# Allegro board 8266-OLED-TIMER-MAX-TPS7333-DS3231.brd
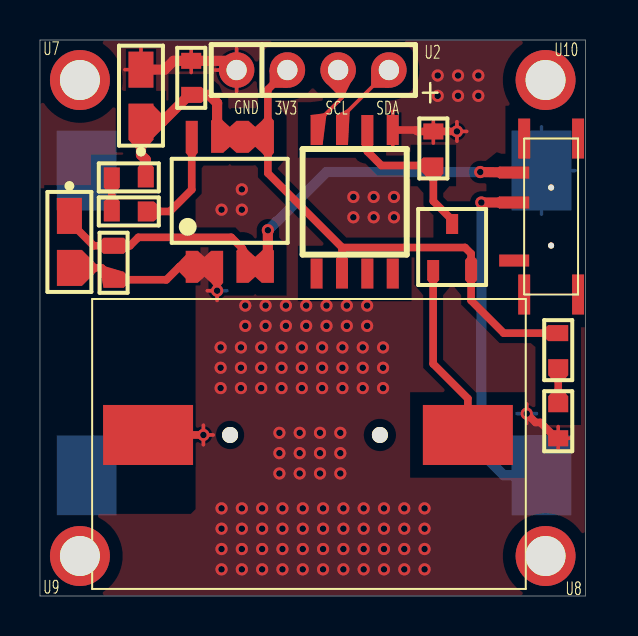
[diagram p0: board, top side]
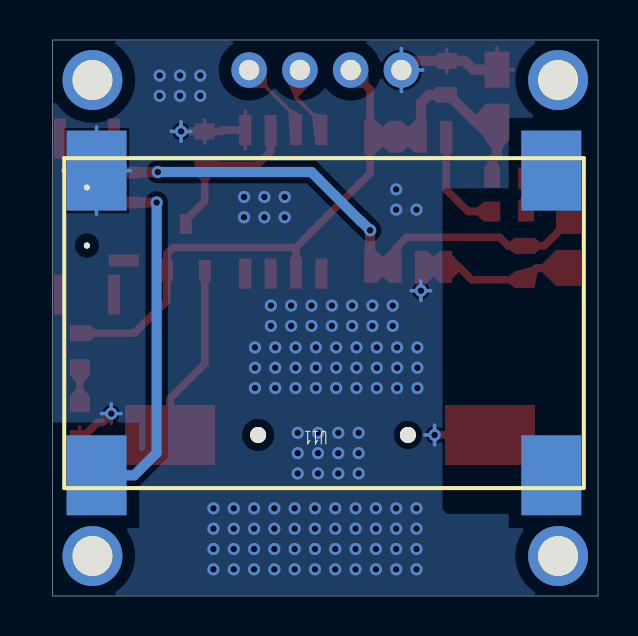
[diagram p1: board, bottom side, seen from below]

Outline 27.3 x 27.8 mm; copper layers: TOP, BOTTOM. Coordinates in mm from the lower left corner of the outline.
Outline path: 0,27.8 0,0 27.3,0 27.3,27.8 0,27.8

## Design rules (mm)
net group DIFFPAIR3: nets SCL SDA

## Placement (name value [footprint] x y rotation side)
BT1  BATTERY  [BT]  13.41 8.05 180 top
C1  10uF  [SMDC3216]  1.47 17.7 270 top
C2  0.1uF  [SMD0603]  3.68 16.66 270 top
C3  10uF  [SMDC3216]  5.05 25.02 90 top
C5  100n  [SMD0603]  7.57 25.91 90 top
C6  100n  [SMD0603]  19.68 22.38 90 top
POWER1  LED  [SMD0603]  25.93 8.74 90 top
R1  250k  [SMD0603]  4.45 19.23 180 top
R2  10k  [SMD0603]  4.45 20.93 180 top
R3  470  [SMD0603]  25.93 12.29 270 top
U1  TPS7333  [SOP8-1P27]  7.59 16.46 90 top
U2  4PIN  [SIP4]  9.84 26.3 0 top
U5  DS3231MZRL  [SOIC-8]  15.75 19.71 90 top
U6  BAT54C  [SOT23-3]  20.62 17.45 90 top
U7  1PIN  [HOLE_2MM]  2 25.8 0 top
U8  1PIN  [HOLE_2MM]  25.3 2 0 top
U9  1PIN  [HOLE_2MM]  2 2 0 top
U10  1PIN  [HOLE_2MM]  25.3 25.8 0 top
U11  4056mokuai  [4056MOKUAI]  0.71 21.89 0 bottom
U12  7PINKEY  [7JIAO-BODONGKAIGUAN]  25.58 18.97 180 top

## Library data of the parts
BT1 = BATTERY
C1 C3 = CAP
C2 C5 C6 = CAP NP
POWER1 = LED
R1-R3 = R
U1 = TPS7333
U2 = 4PIN
U5 = DS3231MZRL
U6 = BAT54C
U7-U10 = 1PIN
U11 = 4056mokuai
U12 = 7PINKEY

## Footprints (pads in the part's own frame, mm; a bottom-side part is the same pattern mirrored in y, then rotated)
7JIAO-BODONGKAIGUAN
  round 0.3 hole 0.8: (0,1.45) (0,-1.45)
  rect 0.599x1.999 smd: 1(1.349,3.899) 2(-1.349,3.899) 3(-1.349,-3.899) 4(1.349,-3.899)
  rect 1.501x0.599 smd: 5(1.849,2.2) 6(1.849,-0.701) 7(1.849,-2.2)
4056MOKUAI
  rect 3x4 smd: 1(1.626,15.86) 2(1.626,0.625) 3(24.384,0.625) 4(24.384,15.86)
BT
  round 0.8 hole 1.199 unplated: (-3.599,0)
  round 0.8 hole 1.001 unplated: (3.899,0)
  rect 4.501x3 smd: 1(-8.001,0) 2(8.001,0)
HOLE_2MM
  round 3 hole 1.999 unplated: (0,0)
SIP4
  round 1.778 hole 1.016: 1(0,0) 2(2.54,0) 3(5.08,0) 4(7.62,0)
SMD0603
  rect 0.8x1.001 smd: 1(-0.851,0) 2(0.851,0)
SMDC3216
  rect 1.801x1.25 smd: 1(-1.3,0) 2(1.3,0)
SOIC-8
  rect 1.501x0.599 smd: 1(-3.589,1.905) 2(-3.589,0.635) 3(-3.589,-0.635) 4(-3.589,-1.905) 5(3.589,-1.905) 6(3.589,-0.635) 7(3.589,0.635) 8(3.589,1.905)
SOP8-1P27
  rect 1.6x0.599 smd: 1(0,0) 2(0,-1.27) 3(0,-2.54) 4(0,-3.81) 5(6.5,-3.81) 6(6.5,-2.54) 7(6.5,-1.27) 8(6.5,0)
SOT23-3
  rect 1.001x0.599 smd: 1(-1.151,0.95) 2(-1.151,-0.95) 3(1.151,0)

## Nets
3V3: C3.1 C5.1 R2.1 R3.1 U1.5(OUT#5) U1.6(OUT#6) U1.7(FB) U2.2 U5.2(VCC) U6.2
0: BT1.2(-) C1.2 C2.2 C3.2 C5.2 C6.2 POWER1.1(CATHODE) U1.1(GND) U1.2(EN) U2.1 U5.5(GND) U11.3(OUT-)
BAT-IN: U11.4(OUT+) U12.6
BAT-OUT: C1.1 C2.1 U1.3(IN#3) U1.4(IN#4) U12.7
SCL: U2.3 U5.8(SCL)
SDA: U2.4 U5.7(SDA)
N70651: R1.1 U1.8(RESET)
N70975: POWER1.2(ANODE) R3.2
N127191: R1.2 R2.2
N128054: C6.1 U5.6(VBAT) U6.3
N128552: BT1.1(+) U6.1

Pads without a net: U5 1 3 4; U11 1 2; U12 1 2 3 4 5

## Via types
v1: diameter 0.61, hole 0.33, TOP to BOTTOM, 119 vias

## Routing (per net, layer and track width the routed paths; a pad name or vN(x,y) marks a point on that pad's centre or on a via; arc(x,y) is an arc through that point)
3V3: length 37.7
  TOP w0.381: 15.12,17.42 21.27,17.42 21.57,17.12 U6.2 21.57,14.78 23.21,13.14 R3.1 ; 15.12,17.42 15.11,17.42 U5.2 ; 15.12,17.42 11.4,21.14 U1.5 ; U1.5 U1.6 U1.7 ; U1.5 11.4,25.32 U2.2
  TOP w0.508: R2.1 5.3,21.82 5.05,22.06 C3.1 6.13,23.72 7.47,25.06 C5.1 8.46,25.06 8.86,24.65 U1.7
0: length 56.2
  TOP w0.178: 4.25,26.32 C3.2 5.05,27.4 ; 19.68,23.81 C6.2 19.68,22.64 ; 24.36,9.61 v1(24.36,9.12) 24.36,8.63 ; U2.1 9.84,27.37 ; U2.1 8.77,26.3 ; U2.1 9.84,25.23 ; v1(20.87,23.23) 20.87,23.72 ; v1(20.87,23.23) 21.35,23.23 ; v1(20.87,23.23) 20.87,22.74 ; POWER1.1 25.93,8.47 ; POWER1.1 26.62,7.89 ; POWER1.1 25.93,7.3 ; 7.57,27.34 C5.2 7.57,26.17 ; 8.38,15.27 v1(8.86,15.27) 8.86,14.78 ; 17.65,22.36 U5.5 17.65,24.23 ; v1(8.18,8.05) 8.18,8.54 ; v1(8.18,8.05) 8.67,8.05 ; v1(8.18,8.05) 8.18,7.56
  TOP w0.381: v1(24.36,9.12) 24.8,8.68 25.04,8.68 25.83,7.89 POWER1.1 ; v1(20.87,23.23) C6.2 18.86,23.23 18.79,23.3 U5.5 ; v1(8.86,15.27) U1.2 U1.1 6.97,16.46 6.33,15.81 C2.2 3.09,16.4 C1.2 ; BT1.2 v1(8.18,8.05)
  TOP w0.508: U2.1 9.38,26.76 C5.2 6.68,26.76 6.24,26.32 C3.2
  BOTTOM w0.178: v1(20.87,23.23) 21.35,23.23 ; v1(20.87,23.23) 20.87,23.72 ; v1(20.87,23.23) 20.38,23.23 ; v1(20.87,23.23) 20.87,22.74 ; v1(8.86,15.27) 9.35,15.27 ; v1(8.86,15.27) 8.86,14.78 ; v1(8.86,15.27) 8.38,15.27 ; v1(8.86,15.27) 8.86,15.75 ; 25.1,19.09 U11.3 ; U11.3 25.1,23.45 ; U11.3 23.41,21.27 ; U11.3 26.78,21.27 ; v1(24.36,9.12) 24.85,9.12 ; v1(24.36,9.12) 24.36,9.61 ; v1(24.36,9.12) 23.87,9.12 ; 9.84,25.23 U2.1 ; U2.1 9.84,27.37 ; U2.1 8.77,26.3 ; v1(8.18,8.05) 8.67,8.05 ; v1(8.18,8.05) 8.18,7.56 ; v1(8.18,8.05) 8.18,8.54
  vias: v1(9.04,12.43) v1(9.04,11.41) v1(9.04,10.4) v1(9.09,19.32) v1(9.09,4.38) v1(9.09,3.37) v1(9.09,2.35) v1(9.09,1.33) v1(10.1,20.33) v1(10.1,19.32) v1(10.06,12.43) v1(10.06,11.41) v1(10.06,10.4) v1(10.1,4.38) v1(10.1,3.37) v1(10.1,2.35) v1(10.1,1.33) v1(10.27,14.52) v1(10.27,13.51) v1(11.07,12.43) v1(11.07,11.41) v1(11.07,10.4) v1(11.12,4.38) v1(11.12,3.37) v1(11.12,2.35) v1(11.12,1.33) v1(11.29,14.52) v1(11.29,13.51) v1(11.98,8.16) v1(11.98,7.14) v1(11.98,6.13) v1(12.09,12.43) v1(12.09,11.41) v1(12.09,10.4) v1(12.13,4.38) v1(12.13,3.37) v1(12.13,2.35) v1(12.13,1.33) v1(12.31,14.52) v1(12.31,13.51) v1(13,8.16) v1(13,7.14) v1(13,6.13) v1(13.1,12.43) v1(13.1,11.41) v1(13.1,10.4) v1(13.15,4.38) v1(13.15,3.37) v1(13.15,2.35) v1(13.15,1.33) v1(13.32,14.52) v1(13.32,13.51) v1(14.01,8.16) v1(14.01,7.14) v1(14.01,6.13) v1(14.12,12.43) v1(14.12,11.41) v1(14.12,10.4) v1(14.17,4.38) v1(14.17,3.37) v1(14.17,2.35) v1(14.17,1.33) v1(14.34,14.52) v1(14.34,13.51) v1(15.03,8.16) v1(15.03,7.14) v1(15.03,6.13) v1(15.14,12.43) v1(15.14,11.41) v1(15.14,10.4) v1(15.18,4.38) v1(15.18,3.37) v1(15.18,2.35) v1(15.18,1.33) v1(15.35,14.52) v1(15.35,13.51) v1(15.68,19.95) v1(15.68,18.94) v1(16.15,12.43) v1(16.15,11.41) v1(16.15,10.4) v1(16.2,4.38) v1(16.2,3.37) v1(16.2,2.35) v1(16.2,1.33) v1(16.37,14.52) v1(16.37,13.51) v1(16.7,19.95) v1(16.7,18.94) v1(17.17,12.43) v1(17.17,11.41) v1(17.17,10.4) v1(17.21,4.38) v1(17.21,3.37) v1(17.21,2.35) v1(17.21,1.33) v1(17.71,19.95) v1(17.71,18.94) v1(18.23,4.38) v1(18.23,3.37) v1(18.23,2.35) v1(18.23,1.33) v1(19.25,4.38) v1(19.25,3.37) v1(19.25,2.35) v1(19.25,1.33) v1(19.9,26.02) v1(19.9,25.01) v1(20.92,26.02) v1(20.92,25.01) v1(21.94,26.02) v1(21.94,25.01)
BAT-IN: length 17.6
  TOP w0.508: U12.6 v1(22.09,19.67)
  BOTTOM w0.508: v1(22.09,19.67) 22.09,7.16 23.21,6.04 U11.4
BAT-OUT: length 27.4
  TOP w0.381: U1.4 U1.3 10.13,17.37 9.57,17.93 4.92,17.93 4.5,17.51 C2.1 2.69,17.51 1.47,18.73 C1.1
  TOP w0.508: v1(11.4,18.29) U1.4 ; U12.7 v1(22.03,21.2)
  BOTTOM w0.508: v1(11.4,18.29) 11.85,18.73 11.87,18.73 14.34,21.2 v1(22.03,21.2)
SCL: length 3.6
  TOP w0.178: U5.8 13.84,23.65 15.11,24.92 15.11,26.11 U2.3 14.92,26.3
SDA: length 4
  TOP w0.178: U2.4 15.11,23.95 U5.7
N70651: length 5.4
  TOP w0.381: R1.1 6.5,19.23 7.59,20.32 U1.8
N70975: length 1.9
  TOP w0.381: R3.2 POWER1.2
N127191: length 1.7
  TOP w0.381: R2.2 R1.2
N128054: length 8
  TOP w0.381: U6.3 20.62,18.8 19.68,19.74 C6.1 17.08,21.53 16.38,22.23 U5.6
N128552: length 9
  TOP w0.381: BT1.1 21.41,9.87 19.67,11.61 U6.1

## Copper pours and planes (outline as drawn; the poured copper is in the pictures)
3V3 on TOP (solid shape): 5.68,22.82 5.18,22.23 5.05,22.19 4.93,22.23 4.43,22.82 5.05,23.78
3V3 on TOP (solid shape): 6.35,23.84 6.39,23.72 6.35,23.59 5.68,22.91 4.99,23.72 5.68,24.53
0 on TOP (solid shape): 2.89,16.51 2.92,16.4 2.89,16.29 2.1,15.5 1.42,16.4 2.1,17.3
0 on TOP: 0.04,0.04 0.04,4.1 7.55,4.1 7.79,4.34 7.79,20.25 7.65,20.38 0.04,20.38 0.04,27.76 27.26,27.76 27.26,0.04 ; 8 cut-outs
0 on BOTTOM: 0.04,0.04 0.04,4.1 7.55,4.1 7.79,4.34 7.79,20.25 7.65,20.38 0.04,20.38 0.04,27.76 27.26,27.76 27.26,0.04 ; 5 cut-outs
3V3 on TOP (solid shape): 9.92,23.07 9.96,22.96 9.92,22.84 9.16,22.16 8.82,22.96 9.16,23.76
3V3 on TOP (solid shape): 10.18,22.96 9.83,22.16 9.08,22.84 9.04,22.96 9.08,23.07 9.83,23.76
3V3 on TOP (solid shape): 11.19,23.07 11.23,22.96 11.19,22.84 10.43,22.16 10.09,22.96 10.43,23.76
3V3 on TOP (solid shape): 11.45,22.96 11.1,22.16 10.35,22.84 10.31,22.96 10.35,23.07 11.1,23.76
0 on TOP (solid shape): 7.64,16.46 7.29,15.87 6.81,16.37 6.78,16.46 6.81,16.55 7.29,17.05
0 on TOP (solid shape): 8.65,16.57 8.69,16.46 8.65,16.34 7.89,15.66 7.55,16.46 7.89,17.26
0 on TOP (solid shape): 8.91,16.46 8.56,15.66 7.81,16.34 7.77,16.46 7.81,16.57 8.56,17.26
0 on TOP (solid shape): 2.99,16.31 3.06,16.45 3.21,16.5 4.18,16.21 3.72,15.78 3.19,15.41
BAT-OUT on TOP (solid shape): 11.19,16.57 11.23,16.46 11.19,16.34 10.43,15.66 10.09,16.46 10.43,17.26
BAT-OUT on TOP (solid shape): 11.45,16.46 11.1,15.66 10.35,16.34 10.31,16.46 10.35,16.57 11.1,17.26
SCL on TOP (solid shape): 14.24,24.14 14.31,24.11 14.33,24.04 14.14,22.55 13.83,23.28 13.54,24.05
SCL on TOP (solid shape): 15.56,25.69 15.19,24.94 15.13,24.89 15.05,24.91 14.3,25.67 14.92,26.32
SDA on TOP (solid shape): 15.38,24.34 15.46,24.32 15.5,24.25 15.41,22.55 15.11,23.28 14.81,24.05

Small or netless copper shapes (teardrops, artwork), in the pictures only: 29 on TOP

## Text on the board
Ref Des/Silkscreen Top: GND | 3V3 | SCL | SDA | + | BILIBILI UID:177810096 | Free and open source
